# Altium PCB FC_PCB.PcbDoc (part 1 of 2)
Units mm, origin at the board's own origin, x right, y up, seen from the top; angles counter-clockwise.
Board outline 46 x 54 mm, 4 copper layers (Top Layer, GND, 3V3, Bottom Layer), stack 0.603 mm thick; 126 components, 94 nets, 458 pads, 139 vias.
Unrouted connection lines stored in the file: 5.
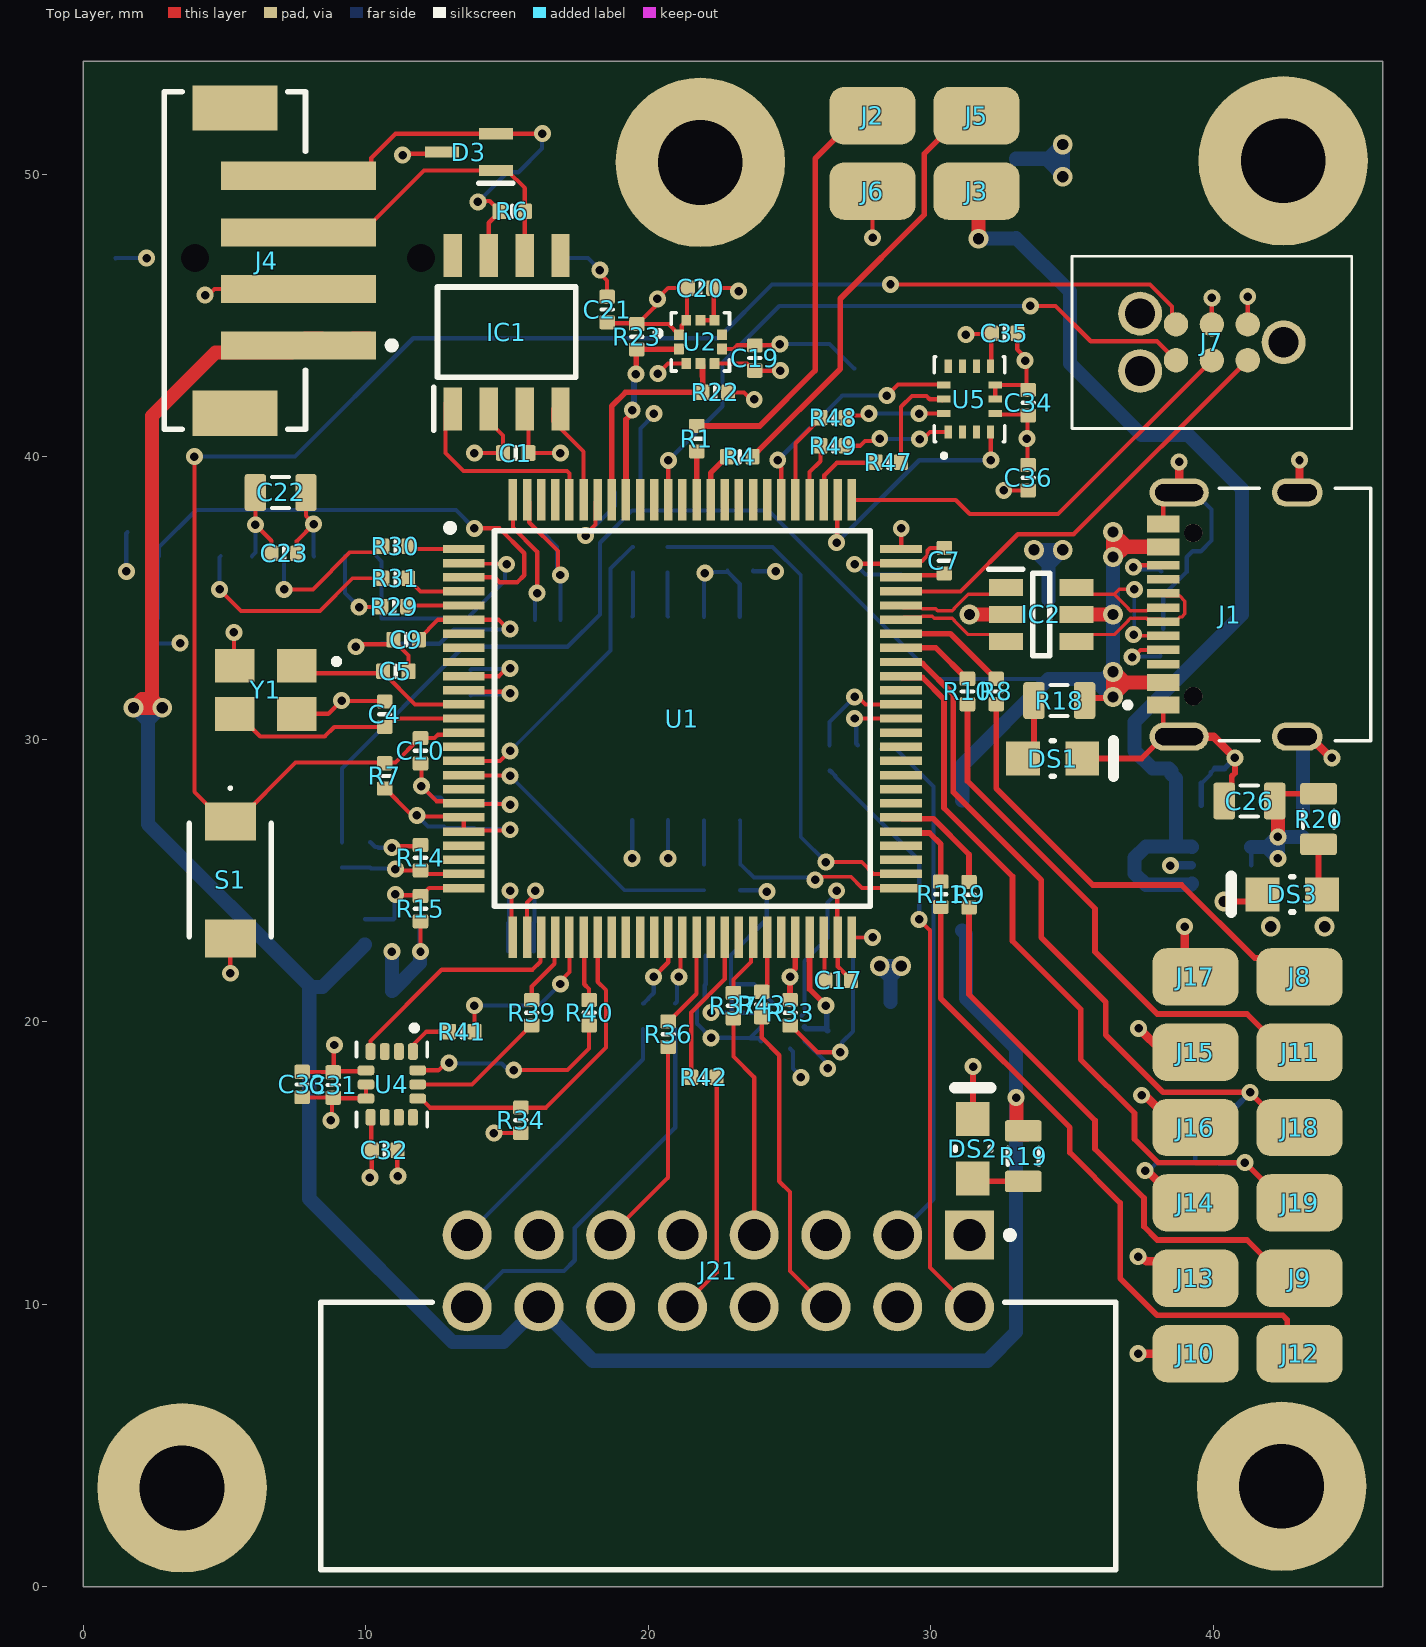
[diagram p0: Top Layer view]
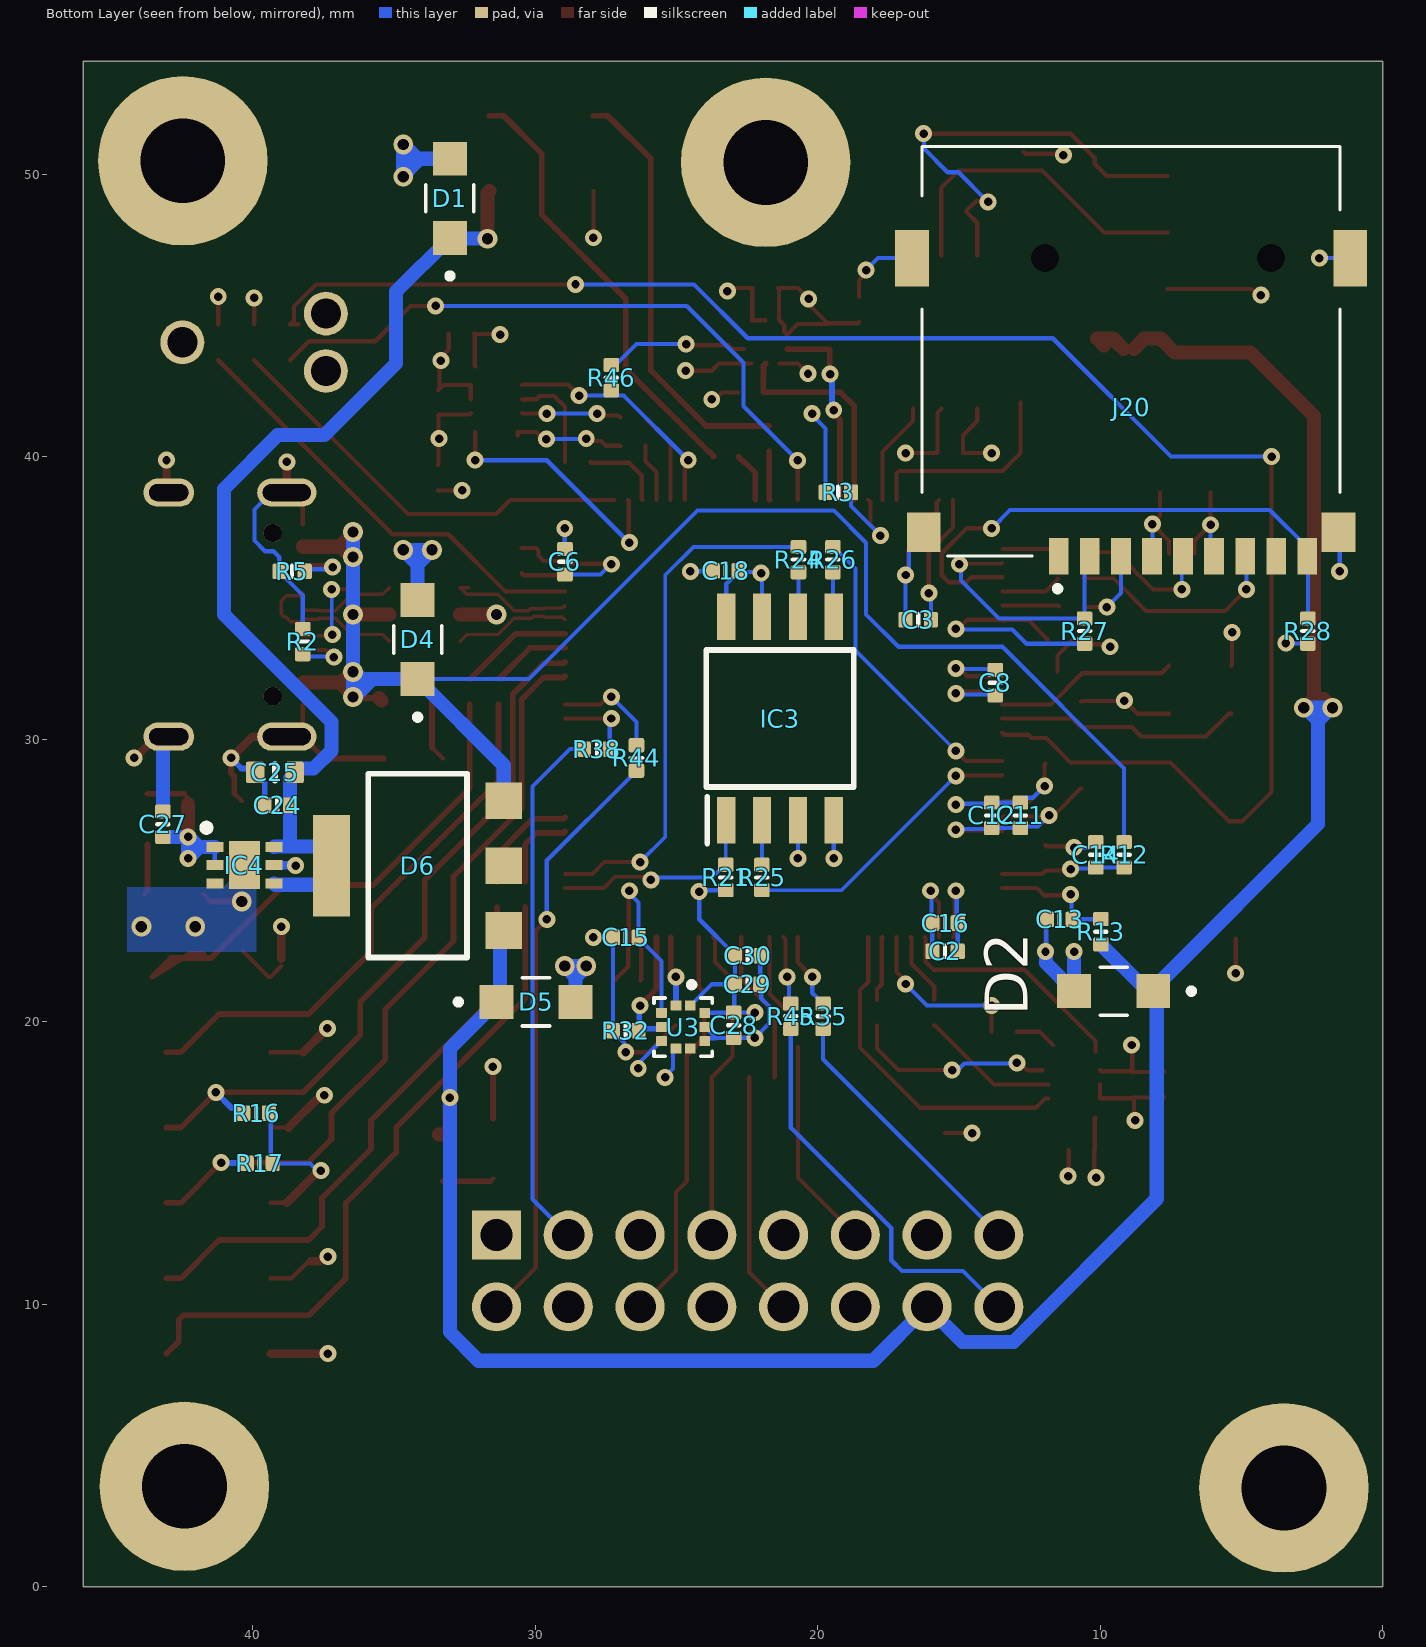
[diagram p1: Bottom Layer view, seen from below]
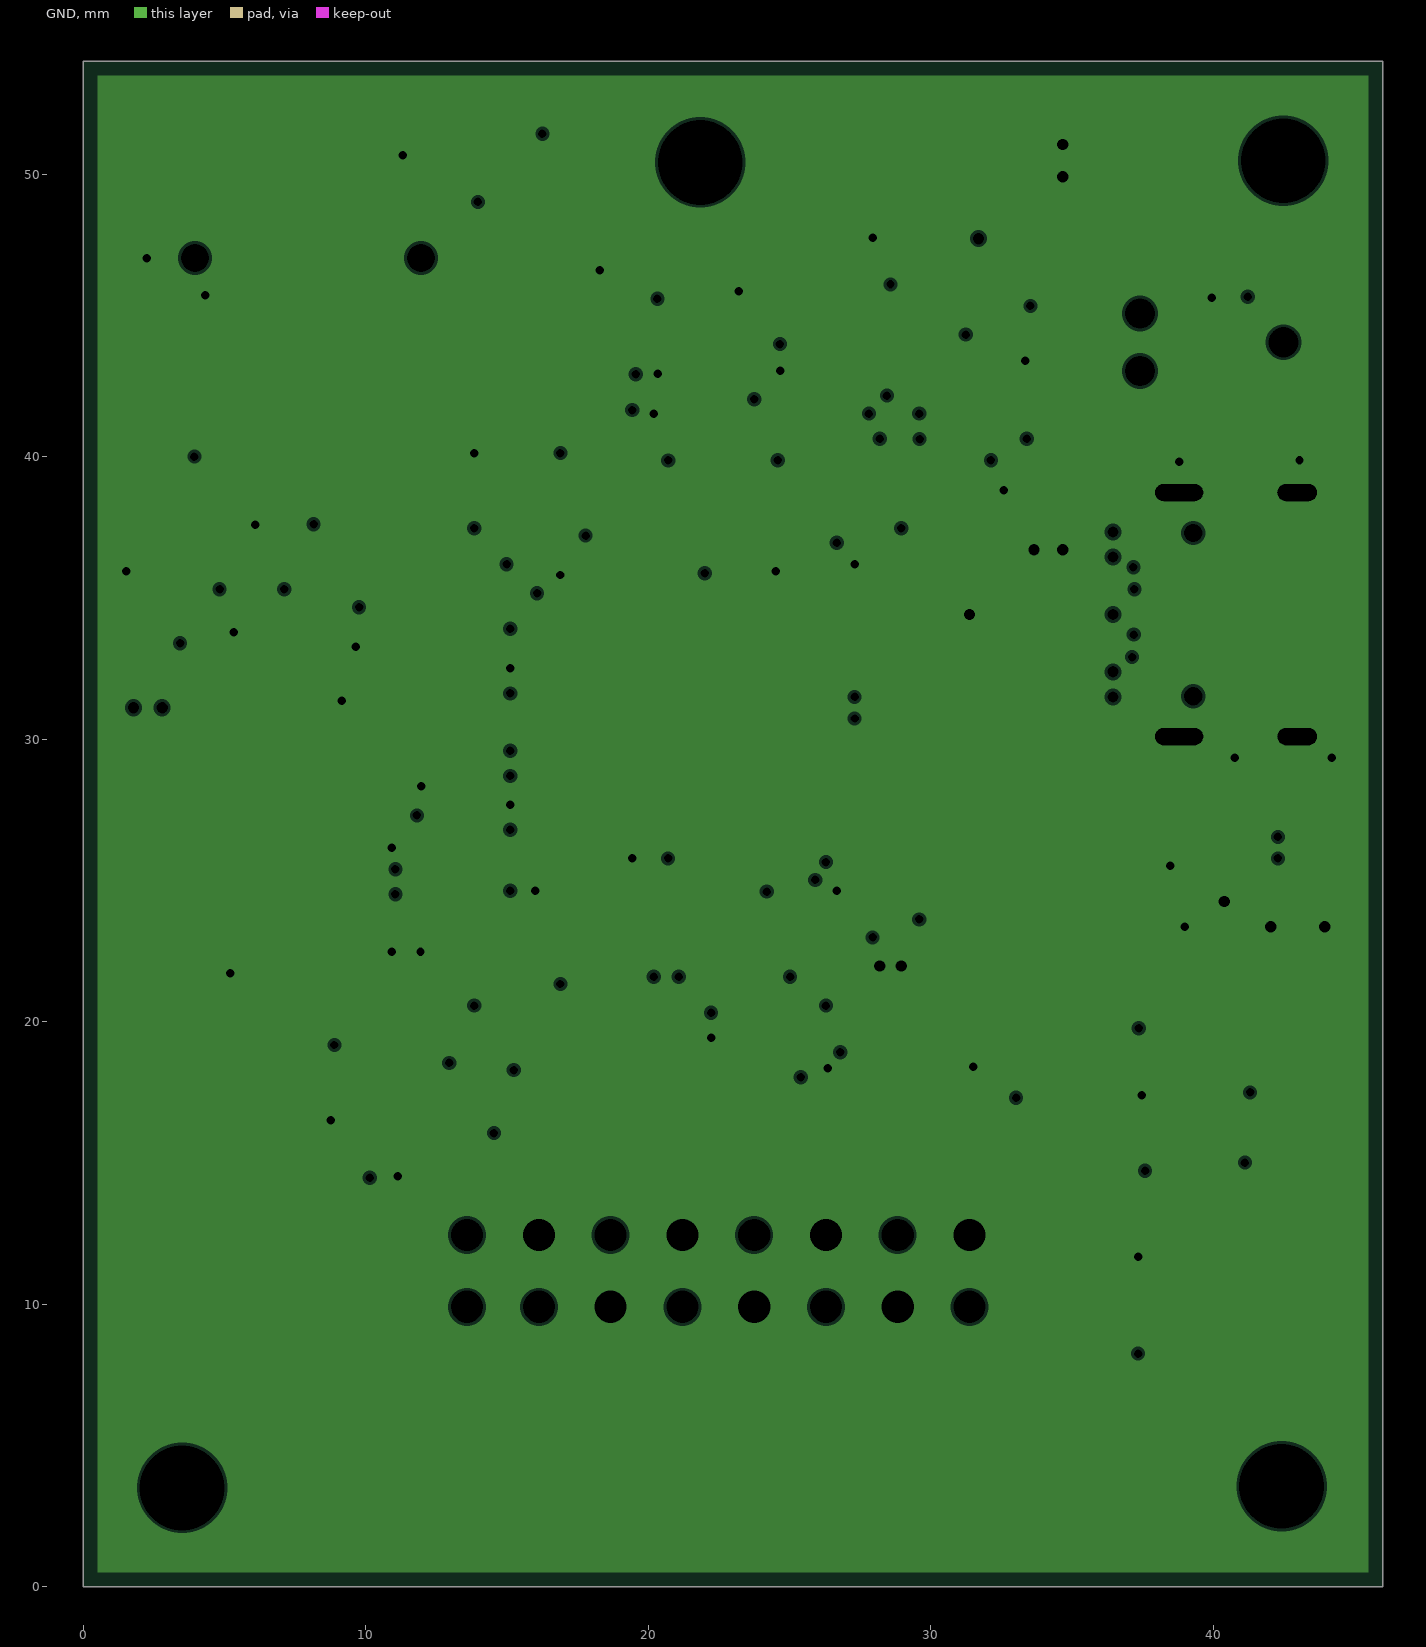
[diagram p2: GND, clearances drawn from the general rule]
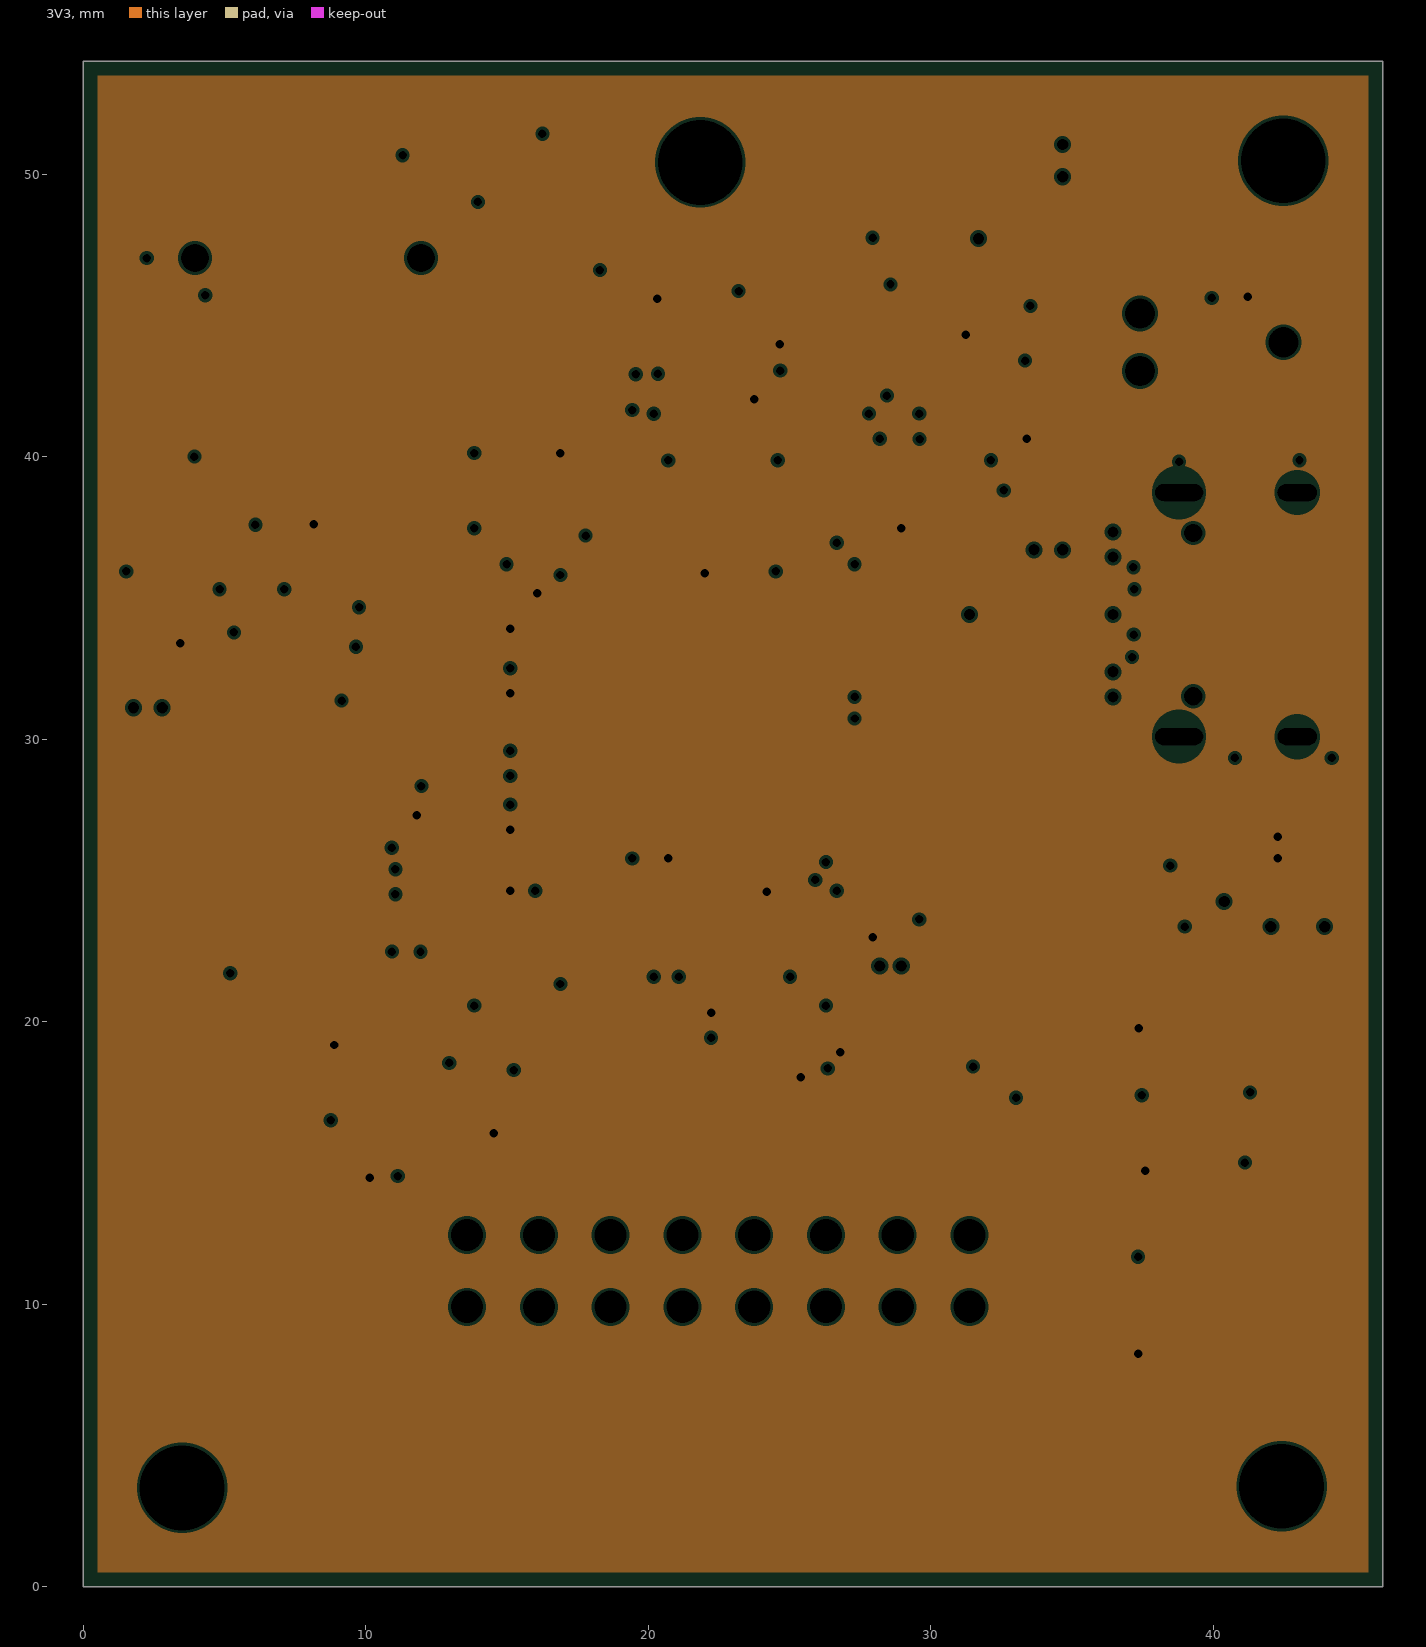
[diagram p3: 3V3, clearances drawn from the general rule]
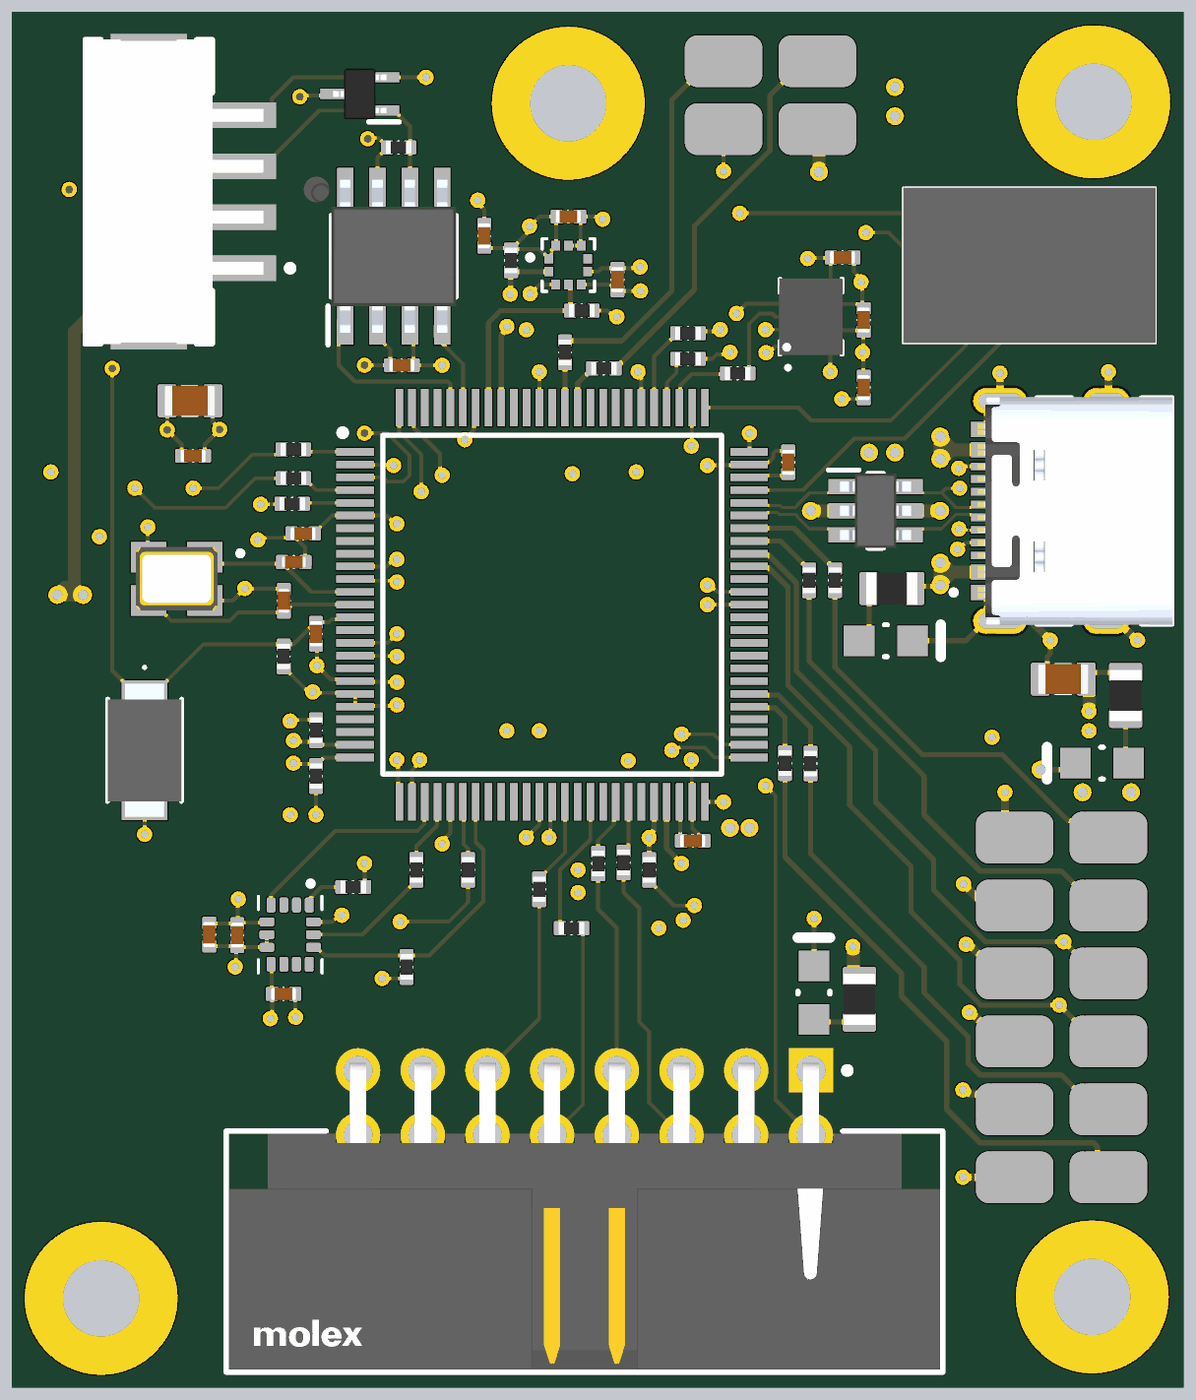
[diagram p5: 3D render of the assembled board from above, using the file's embedded part models]
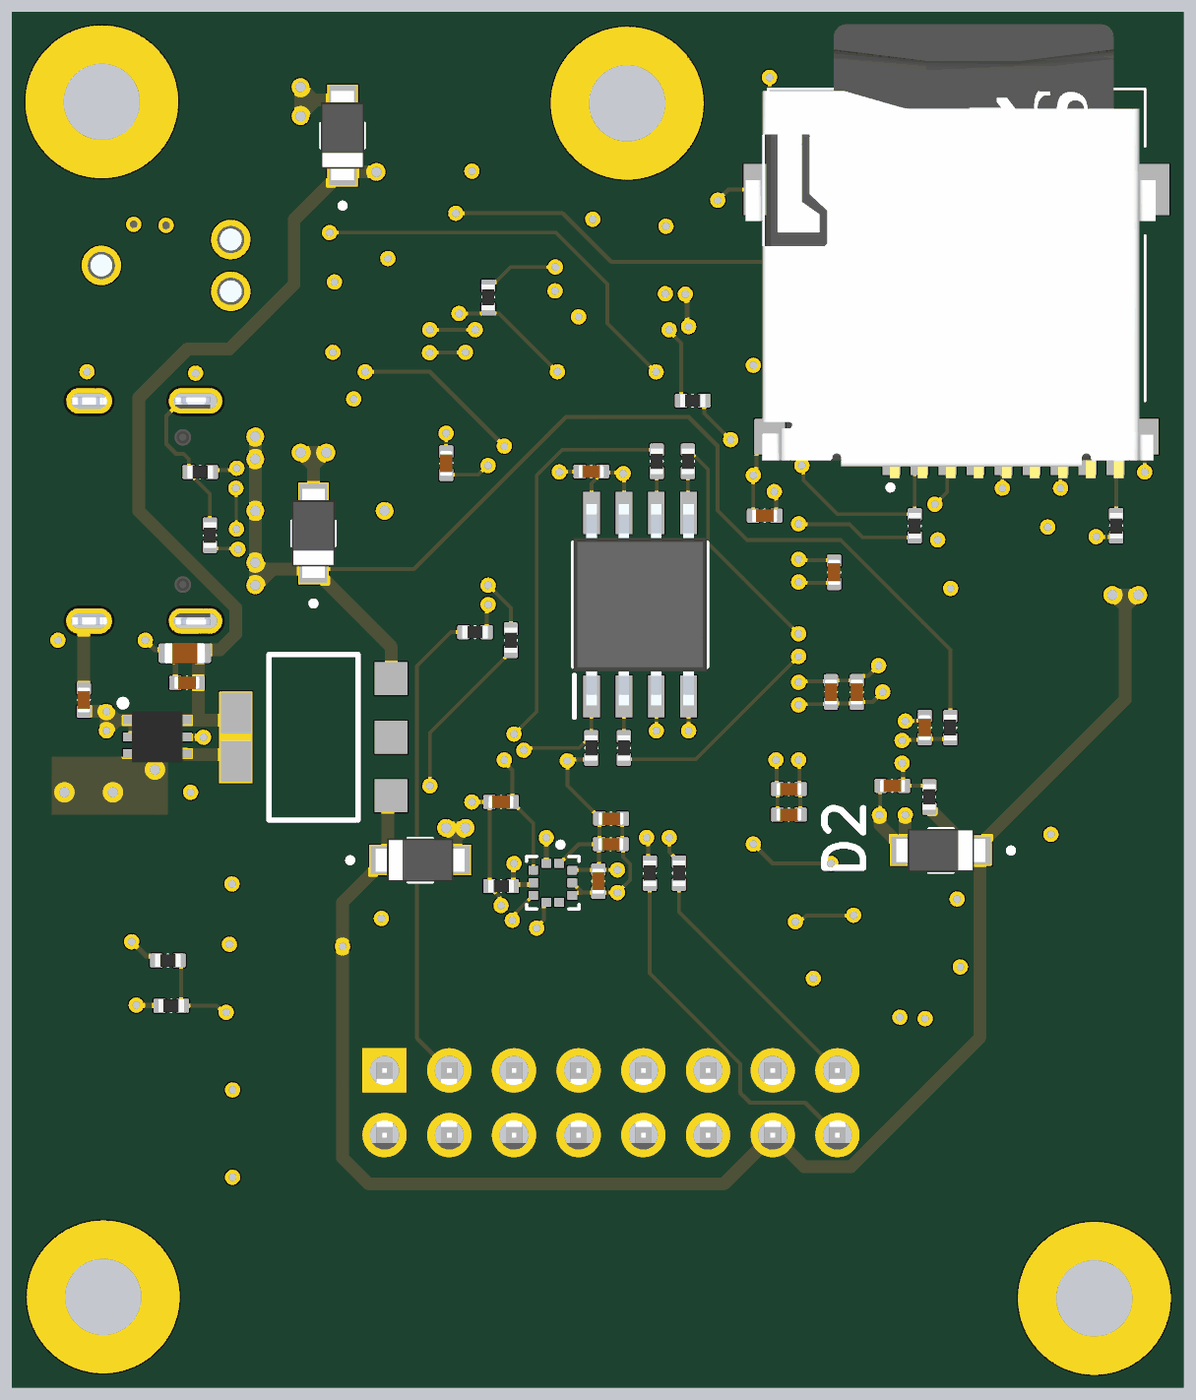
[diagram p6: 3D render of the assembled board from below, using the file's embedded part models]

## Layer stack, top to bottom
Top Solder: solder mask 0.0102, Solder Resist, Dk 3.5
Top Layer: signal copper 0.0356
Dielectric 2: prepreg 0.0711, PP-006, Dk 4.1
GND: plane copper 0.035, net GND
Dielectric 1: dielectric 0.32, FR-4, Dk 4.8
3V3: plane copper 0.035, net 3V3
Dielectric 3: prepreg 0.0711, PP-006, Dk 4.1
Bottom Layer: signal copper 0.0356
Bottom Solder: solder mask 0.0102, Solder Resist, Dk 3.5

## Board outline
0,0 0,54 46,54 46,0

## Design rules (kind name [scope] priority, off if disabled: settings)
BoardOutlineClearance [All] p1: gap=0.2 ignorepadtopadclearanceinfootprint=FALSE
Clearance I2C_Clearance [InNetClass('I2C')] p1: gap=0.127 ignorepadtopadclearanceinfootprint=TRUE except(0.25: Arc-Hole Track-Hole SMDPad-Hole THPad-Hole Via-Hole Fill-Hole Poly-Hole Region-Hole Text-Hole)
Clearance RF_Clearance [InNetClass('RF')] p2: gap=0.2 ignorepadtopadclearanceinfootprint=TRUE except(0.25: Arc-Hole Track-Hole SMDPad-Hole THPad-Hole Via-Hole Fill-Hole Poly-Hole Region-Hole Text-Hole)
Clearance HIGH_SPEED_Clearance [(InNetClass('SD_CARD') OR InNetClass('SENSORS_SPI'))] p3: gap=0.25 ignorepadtopadclearanceinfootprint=TRUE
Clearance [All] p4: gap=0.127 ignorepadtopadclearanceinfootprint=TRUE except(0.25: Arc-Hole Track-Hole SMDPad-Hole THPad-Hole Via-Hole Fill-Hole Poly-Hole Region-Hole Text-Hole)
ComponentClearance [All] p1: gap=0.102 collisioncheckmode=3 verticalgap=0.102 showdistances=TRUE
DiffPairsRouting USB_DIF_PAIR [All] p1: maxlimit=0.15 minlimit=0.15 mostfreqgap=0.15 toplayer_minwidth=0.12 toplayer_maxwidth=0.12 toplayer_prefwidth=0.12 bottomlayer_minwidth=0.12 bottomlayer_maxwidth=0.12 bottomlayer_prefwidth=0.12 maxuncoupledlength=12.7
DiffPairsRouting [All] p2: maxlimit=0.102 minlimit=0.102 mostfreqgap=0.102 toplayer_minwidth=0.102 toplayer_maxwidth=1816.048 toplayer_prefwidth=0.102 bottomlayer_minwidth=0.102 bottomlayer_maxwidth=1816.048 bottomlayer_prefwidth=0.102 maxuncoupledlength=12.7
Height [All] p1: minheight=0 maxheight=1816.048 prefheight=12.7
HoleSize [All] p1: absolutevalues=TRUE maxlimit=6.3 minlimit=0.2 maxpercent=80.000 minpercent=20.000
HoleToHoleClearance [All] p1: gap=0.25 allowstackedmicrovias=FALSE
MinimumAnnularRing [All] p1: minimumring=0.076
MinimumSolderMaskSliver [All] p1: minsoldermaskwidth=0
PlaneClearance [All] p1: clearance=0.102
PlaneConnect PlaneConnectPowerPads [InPadClass('PowerPads')] p1: planeconnectstyle=Direct reliefexpansion=0.508 reliefentries=4 reliefconductorwidth=0.254 reliefairgap=0.254
PlaneConnect [All] p2: pad.planeconnectstyle=Relief pad.reliefexpansion=0.3 pad.reliefentries=4 pad.reliefconductorwidth=0.102 pad.reliefairgap=0.102 via.planeconnectstyle=Direct via.reliefexpansion=0.3 via.reliefentries=4 via.reliefconductorwidth=0.127 via.reliefairgap=0.127
PolygonConnect POWER_RELIEF [(InNet('3V3') OR InNet('GND') OR InNetClass('POWER'))] p1: connectstyle=Direct reliefconductorwidth=0.3 reliefentries=4 polygonreliefangle="90 Angle" airgapwidth=0.254
PolygonConnect PolygonConnectPowerPads [All vs (InPadClass('PowerPads'))] p2: connectstyle=Direct reliefconductorwidth=0.254 reliefentries=4 polygonreliefangle="90 Angle" airgapwidth=0.254
PolygonConnect [All] p3: connectstyle=Relief reliefconductorwidth=0.102 reliefentries=4 polygonreliefangle="90 Angle" airgapwidth=0.102
RoutingVias Power [InNetClass('POWER')] p1: holewidth=0.4 width=0.7 viastyle="Through Hole" minholewidth=0.2 minwidth=0.6 maxholewidth=0.6 maxwidth=1
RoutingVias [All] p2: holewidth=0.3 width=0.6 viastyle="Through Hole" minholewidth=0.2 minwidth=0.45 maxholewidth=6.3 maxwidth=6.55
SilkToSilkClearance [All] p1: silktosilkclearance=0
SilkToSolderMaskClearance [IsPad] p1: minsilkscreentomaskgap=0.102 clearancetoexposedcopper=TRUE
SolderMaskExpansion [All] p1: expansion=0.05 istentingtop=FALSE
SupplyNets "Schematic Supply Nets_4" [InNet('VBUS')] p1: voltage=0.000
SupplyNets "Schematic Supply Nets_3" [InNet('VBAT')] p2: voltage=0.000
SupplyNets "Schematic Supply Nets_2" [InNet('GND')] p3: voltage=0.000
SupplyNets "Schematic Supply Nets_1" [InNet('5V')] p4: voltage=0.000
SupplyNets "Schematic Supply Nets" [InNet('3V3')] p5: voltage=0.000
Width RF/GPS_WIDTH [InNetClass('RF')] p1: maxlimit=0.3 minlimit=0.15 preferedwidth=0.2 minimp=50.000000 maximp=50.000000 favimp=50.000000
Width I2C_WIDTH [InNetClass('I2C')] p2: maxlimit=0.3 minlimit=0.15 preferedwidth=0.2 minimp=50.000000 maximp=50.000000 favimp=50.000000
Width SENSORS_WIDTH [InNetClass('SENSORS_SPI')] p3: maxlimit=0.2 minlimit=0.15 preferedwidth=0.15 minimp=50.000000 maximp=50.000000 favimp=50.000000
Width SD/FLASH_WIDTH [(InNetClass('FLASH_SPI') OR InNetClass('SD_CARD'))] p4: maxlimit=0.15 minlimit=0.13 preferedwidth=0.135 minimp=50.000000 maximp=50.000000 favimp=50.000000
Width Power_WIDTH [InNetClass('POWER')] p5: maxlimit=1 minlimit=0.3 preferedwidth=0.5 minimp=50.000000 maximp=50.000000 favimp=50.000000
Width [All] p6: maxlimit=0.3 minlimit=0.127 preferedwidth=0.15 minimp=50.000000 maximp=50.000000 favimp=50.000000
20 further rules are at their usual default settings.

## Classes and differential pairs
net class USB_DIF_PAIR: STM_D_N STM_D_P USB_D_N USB_D_P
net class I2C: Baro1_SCL Baro1_SDA Baro2_SCL Baro2_SDA I2C3_SCL I2C3_SDA
net class FLASH_SPI: FLASH_CLK FLASH_CS FLASH_DI FLASH_DO FLASH_MISO FLASH_MOSI FLASH_SCK
net class RF: GPS_RX GPS_RX_PAD GPS_TX GPS_TX_PAD RC_RX RC_RX_PAD RC_TX RC_TX_PAD TEL_RX TEL_RX_C TEL_TX TEL_TX_C
net class SD_CARD: SD_CS SD_MISO SD_MOSI SD_SCK TF-IN TF-OUT TF-SCK
net class SENSORS_SPI: AP_SCL AP_SDA AP_SDO IMU1_CS IMU1_INT IMU1_MISO IMU1_MOSI IMU1_SCK IMU2_CS IMU2_INT IMU2_MISO IMU2_MOSI IMU2_SCK SCX SDO SDX
net class POWER: 5V VBAT VBUS
component class FC_Sheet2: C18 C19 C20 C21 C23 C25 C27 C28 C29 C30 C31 C32 C33 C34 C35 C36 D4 D5 IC3 IC4 J19 J21 R18 R19 R21 R23 R27 R29 R31 R33 R35 R37 R39 R41 R48 U2 U3 U4 U5
component class FC_Main: C1 C2 C3 C4 C5 C9 C10 C11 C12 C13 C14 C15 C16 C17 D3 D4 D5 DS1 DS2 DS3 IC1 IC2 J4 J6 J7 J9 J11 J13 J15 J17 J19 J21 R1 R2 R5 R6 R7 R9 R11 R12 R13 R14 R15 R16 R17 R21 S1 U1 Y1
differential pair USB_D: +USB_D_P -USB_D_N
differential pair STM_D: +STM_D_P -STM_D_N

## Components (designator, comment, footprint, x,y, rotation, side; value= is the part's Value field where it differs from the comment)
C1 "Capacitor 100nF +/-20% 10V 0402" CAPC0402(1005)60_L 15.309,40.132 r180 top value=100nF
C2 "Capacitor 2,2µF +/-20% 10V 0402" CAPC0402(1005)60_L 15.494,22.493 r0 bottom value=2.2µF
C3 "Capacitor 100nF +/-20% 10V 0402" CAPC0402(1005)60_L 16.445,34.229 r0 bottom value=100nF
C4 "Capacitor 12pF +/-10% 50V 0402" CAPC0402(1005)33_L 10.675,30.886 r90 top value=12pF
C5 "Capacitor 12pF +/-10% 50V 0402" CAPC0402(1005)33_L 11.066,32.408 r0 top value=12pF
C6 "Capacitor 100nF +/-20% 10V 0402" CAPC0402(1005)60_L 28.947,36.284 r270 bottom value=100nF
C7 "Capacitor 2,2µF +/-20% 10V 0402" CAPC0402(1005)60_L 30.48,36.322 r90 top value=2.2µF
C8 "Capacitor 100nF +/-20% 10V 0402" CAPC0402(1005)60_L 13.716,32.004 r90 bottom value=100nF
C9 "Capacitor 100nF +/-20% 10V 0402" CAPC0402(1005)60_L 11.43,33.528 r180 top value=100nF
C10 "Capacitor 100nF +/-20% 10V 0402" CAPC0402(1005)60_L 11.938,29.591 r270 top value=100nF
C11 "Capacitor 2,2µF +/-20% 10V 0402" CAPC0402(1005)60_L 12.827,27.305 r90 bottom value=2.2µF
C12 "Capacitor 100nF +/-20% 10V 0402" CAPC0402(1005)60_L 13.843,27.305 r90 bottom value=100nF
C13 "Capacitor 100nF +/-20% 10V 0402" CAPC0402(1005)60_L 11.43,23.622 r0 bottom value=100nF
C14 "Capacitor 100nF +/-20% 10V 0402" CAPC0402(1005)60_L 10.16,25.908 r90 bottom value=100nF
C15 "Capacitor 100nF +/-20% 10V 0402" CAPC0402(1005)60_L 26.797,22.987 r180 bottom value=100nF
C16 "Capacitor 100nF +/-20% 10V 0402" CAPC0402(1005)60_L 15.494,23.495 r0 bottom value=100nF
C17 "Capacitor 2,2µF +/-20% 10V 0402" CAPC0402(1005)60_L 26.728,21.463 r0 top value=2.2µF
C18 "Capacitor 100nF +/-20% 10V 0402" CAPC0402(1005)60_L 23.254,35.961 r0 bottom value=100nF
C19 "Capacitor 100nF +/-20% 10V 0402" CAPC0402(1005)60_L 23.775,43.494 r270 top value=100nF
C20 "Capacitor 100nF +/-20% 10V 0402" CAPC0402(1005)60_L 21.847,45.97 r0 top value=100nF
C21 "Capacitor 2,2µF +/-20% 10V 0402" CAPC0402(1005)60_L 18.542,45.212 r90 top value=2.2µF
C22 "Capacitor 22µF +/-40% 16V 0805" CAPC0805(2012)145_L 6.985,38.735 r180 top value=22µF
C23 "Capacitor 100nF +/-20% 10V 0402" CAPC0402(1005)60_L 7.112,36.576 r180 top value=100nF
C24 "Capacitor 100nF +/-20% 10V 0402" CAPC0402(1005)60_L 39.129,27.669 r0 bottom value=100nF
C25 "Capacitor 10µF +/-20% 10V 0603" CAPC0603(1608)100_L 39.215,28.828 r180 bottom value=10µF
C26 "Capacitor 22µF +/-40% 16V 0805" CAPC0805(2012)145_L 41.275,27.813 r180 top value=22µF
C27 "Capacitor 100nF +/-20% 10V 0402" CAPC0402(1005)60_L 43.18,26.993 r90 bottom value=100nF
C28 "Capacitor 100nF +/-20% 10V 0402" CAPC0402(1005)60_L 22.978,19.88 r270 bottom value=100nF
C29 "Capacitor 100nF +/-20% 10V 0402" CAPC0402(1005)60_L 22.488,21.331 r180 bottom value=100nF
C30 "Capacitor 2,2µF +/-20% 10V 0402" CAPC0402(1005)60_L 22.476,22.333 r180 bottom value=2.2µF
C31 "Capacitor 100nF +/-20% 10V 0402" CAPC0402(1005)60_L 8.845,17.761 r270 top value=100nF
C32 "Capacitor 100nF +/-20% 10V 0402" CAPC0402(1005)60_L 10.664,15.453 r0 top value=100nF
C33 "Capacitor 2,2µF +/-20% 10V 0402" CAPC0402(1005)60_L 7.747,17.78 r270 top value=2.2µF
C34 "Capacitor 100nF +/-20% 10V 0402" CAPC0402(1005)60_L 33.446,41.911 r90 top value=100nF
C35 "Capacitor 100nF +/-20% 10V 0402" CAPC0402(1005)60_L 32.61,44.364 r0 top value=100nF
C36 "Capacitor 2,2µF +/-20% 10V 0402" CAPC0402(1005)60_L 33.446,39.258 r270 top value=2.2µF
D1 "PTVS5V0S1UR" TVS_PTVS5V0S1UR 33.02,49.149 r90 bottom
D2 "PTVS5V0S1UR" TVS_PTVS5V0S1UR 9.525,21.082 r0 bottom
D3 "ESD2CAN24DCKRQ1" SOT65P210X110-3N 13.655,50.785 r180 top
D4 "PTVS5V0S1UR" TVS_PTVS5V0S1UR 34.163,33.531 r90 bottom
D5 "PTVS5V0S1UR" TVS_PTVS5V0S1UR 29.972,20.701 r180 bottom
D6 "BAT160C" SOT223 34.163,25.527 r90 bottom
DS1 "LTST-C170KRKT" LTST-C170KRKT_V 34.311,29.317 r0 top
DS2 "LTST-C170KRKT" LTST-C170KRKT_V 31.487,15.502 r90 top
DS3 "LTST-C170KRKT" LTST-C170KRKT_V 42.799,24.511 r180 top
IC1 "TCAN332DR" SOIC127P600X175-8N 14.989,44.409 r90 top
IC2 "USBLC6-2SC6" SOT95P280X145-6N 33.909,34.417 r0 top
IC3 "W25Q128JVSIQ" SOIC127P790X216-8N 21.336,30.734 r90 bottom
IC4 "TLV76733DRVR" SON65P200X200X80-7N 40.293,25.542 r180 bottom
J1 "TYPE-C_16PIN_2MD_(073)" SHOUHAN_TYPE-C_16PIN_2MD_(073) 41.897,34.413 r90 top
J2 "3x2mm Pad" "3x2mm Pad-Footprint-1" 27.94,52.07 r0 top
J3 "3x2mm Pad" "3x2mm Pad-Footprint-1" 31.623,49.403 r0 top
J4 "B4B-PH-SM4-TB" FP-B4B-PH-SM4-TB-MFG 5.37,46.942 r90 top
J5 "3x2mm Pad" "3x2mm Pad-Footprint-1" 31.623,52.07 r0 top
J6 "3x2mm Pad" "3x2mm Pad-Footprint-1" 27.94,49.403 r0 top
J7 "TC2030-IDC-NL" TC2030IDCNL 39.95,44.051 r180 top
J8 "3x2mm Pad" "3x2mm Pad-Footprint-1" 43.053,21.59 r0 top
J9 "3x2mm Pad" "3x2mm Pad-Footprint-1" 43.053,10.922 r0 top
J10 "3x2mm Pad" "3x2mm Pad-Footprint-1" 39.37,8.255 r0 top
J11 "3x2mm Pad" "3x2mm Pad-Footprint-1" 43.053,18.923 r0 top
J12 "3x2mm Pad" "3x2mm Pad-Footprint-1" 43.053,8.255 r0 top
J13 "3x2mm Pad" "3x2mm Pad-Footprint-1" 39.37,10.922 r0 top
J14 "3x2mm Pad" "3x2mm Pad-Footprint-1" 39.37,13.589 r0 top
J15 "3x2mm Pad" "3x2mm Pad-Footprint-1" 39.37,18.923 r0 top
J16 "3x2mm Pad" "3x2mm Pad-Footprint-1" 39.37,16.256 r0 top
J17 "3x2mm Pad" "3x2mm Pad-Footprint-1" 39.37,21.59 r0 top
J18 "3x2mm Pad" "3x2mm Pad-Footprint-1" 43.053,16.256 r0 top
J19 "3x2mm Pad" "3x2mm Pad-Footprint-1" 43.053,13.589 r0 top
J20 "TF-01A" TF01A 8.909,43.731 r0 bottom
J21 "70247-1652" FP-70247-1652-MFG 22.479,5.334 r0 top
R1 "Resistor 22 +/-1 % 0402 63 mW" RESC0402(1005)_L 21.717,40.64 r90 top value=22
R2 "Resistor 5K1 +/-1 % 0402 63 mW" RESC0402(1005)_L 38.227,33.459 r90 bottom value=5k1
R3 "Resistor 10K  +/-1 % 0402 63 mW" RESC0402(1005)_L 19.271,38.744 r180 bottom value=10k
R4 "Resistor 22 +/-1 % 0402 63 mW" RESC0402(1005)_L 23.241,40.005 r0 top value=22
R5 "Resistor 5K1 +/-1 % 0402 63 mW" RESC0402(1005)_L 38.608,35.941 r0 bottom value=5k1
R6 "Resistor 120 +/-1 % 0402 63 mW" RESC0402(1005)_L 15.182,48.685 r180 top value=120
R7 "Resistor 10K  +/-1 % 0402 63 mW" RESC0402(1005)_L 10.668,28.702 r90 top value=10k
R8 "Resistor 22 +/-1 % 0402 63 mW" RESC0402(1005)_L 32.316,31.69 r90 top value=22
R9 "Resistor 22 +/-1 % 0402 63 mW" RESC0402(1005)_L 31.355,24.495 r270 top value=22
R10 "Resistor 22 +/-1 % 0402 63 mW" RESC0402(1005)_L 31.3,31.69 r90 top value=22
R11 "Resistor 22 +/-1 % 0402 63 mW" RESC0402(1005)_L 30.353,24.511 r270 top value=22
R12 "Resistor 100K +/-1 % 0402 63 mW" RESC0402(1005)_L 9.158,25.908 r270 bottom value=100k
R13 "Resistor 100K +/-1 % 0402 63 mW" RESC0402(1005)_L 9.978,23.184 r90 bottom value=100k
R14 "Resistor 100K +/-1 % 0402 63 mW" RESC0402(1005)_L 11.938,25.805 r90 top value=100k
R15 "Resistor 100K +/-1 % 0402 63 mW" RESC0402(1005)_L 11.938,24.003 r270 top value=100k
R16 "4D7KR2F" RESC0402(1005)_L 39.878,16.764 r180 bottom value=4.7k
R17 "4D7KR2F" RESC0402(1005)_L 39.751,14.986 r180 bottom value=4.7k
R18 "Resistor 470R +/-5% 0805 125 mW" RESC0805(2012)_L 34.544,31.369 r180 top value=470
R19 "Resistor 470R +/-5% 0805 125 mW" RESC0805(2012)_L 33.274,15.24 r270 top value=470
R20 "Resistor 470R +/-5% 0805 125 mW" RESC0805(2012)_L 43.727,27.168 r270 top value=470
R21 "Resistor 10K  +/-1 % 0402 63 mW" RESC0402(1005)_L 23.257,25.107 r90 bottom value=10k
R22 "4D7KR2F" RESC0402(1005)_L 22.373,42.278 r0 top value=4.7k
R23 "4D7KR2F" RESC0402(1005)_L 19.595,44.247 r90 top value=4.7k
R24 "Resistor 100K +/-1 % 0402 63 mW" RESC0402(1005)_L 20.682,36.361 r270 bottom value=100k
R25 "Resistor 22 +/-1 % 0402 63 mW" RESC0402(1005)_L 21.976,25.107 r270 bottom value=22
R26 "Resistor 100K +/-1 % 0402 63 mW" RESC0402(1005)_L 19.461,36.361 r270 bottom value=100k
R27 "Resistor 10K  +/-1 % 0402 63 mW" RESC0402(1005)_L 10.554,33.829 r90 bottom value=10k
R28 "Resistor 10K  +/-1 % 0402 63 mW" RESC0402(1005)_L 2.648,33.829 r90 bottom value=10k
R29 "Resistor 22 +/-1 % 0402 63 mW" RESC0402(1005)_L 11.006,34.695 r0 top value=22
R30 "Resistor 22 +/-1 % 0402 63 mW" RESC0402(1005)_L 11.049,36.83 r0 top value=22
R31 "Resistor 22 +/-1 % 0402 63 mW" RESC0402(1005)_L 11.05,35.697 r0 top value=22
R32 "4D7KR2F" RESC0402(1005)_L 26.797,19.685 r0 bottom value=4.7k
R33 "4D7KR2F" RESC0402(1005)_L 25.019,20.32 r270 top value=4.7k
R34 "Resistor 10K  +/-1 % 0402 63 mW" RESC0402(1005)_L 15.494,16.51 r90 top value=10k
R35 "Resistor 22 +/-1 % 0402 63 mW" RESC0402(1005)_L 19.812,20.193 r90 bottom value=22
R36 "Resistor 22 +/-1 % 0402 63 mW" RESC0402(1005)_L 20.701,19.558 r90 top value=22
R37 "Resistor 22 +/-1 % 0402 63 mW" RESC0402(1005)_L 23.016,20.57 r90 top value=22
R38 "Resistor 22 +/-1 % 0402 63 mW" RESC0402(1005)_L 27.818,29.651 r180 bottom value=22
R39 "Resistor 22 +/-1 % 0402 63 mW" RESC0402(1005)_L 15.875,20.32 r90 top value=22
R40 "Resistor 22 +/-1 % 0402 63 mW" RESC0402(1005)_L 17.907,20.32 r90 top value=22
R41 "Resistor 22 +/-1 % 0402 63 mW" RESC0402(1005)_L 13.399,19.65 r0 top value=22
R42 "Resistor 22 +/-1 % 0402 63 mW" RESC0402(1005)_L 21.971,18.034 r180 top value=22
R43 "Resistor 22 +/-1 % 0402 63 mW" RESC0402(1005)_L 24.017,20.61 r90 top value=22
R44 "Resistor 22 +/-1 % 0402 63 mW" RESC0402(1005)_L 26.416,29.337 r90 bottom value=22
R45 "Resistor 22 +/-1 % 0402 63 mW" RESC0402(1005)_L 20.955,20.193 r90 bottom value=22
R46 "Resistor 10K  +/-1 % 0402 63 mW" RESC0402(1005)_L 27.305,42.799 r270 bottom value=10k
R47 "Resistor 22 +/-1 % 0402 63 mW" RESC0402(1005)_L 28.495,39.811 r180 top value=22
R48 "Resistor 22 +/-1 % 0402 63 mW" RESC0402(1005)_L 26.543,41.388 r180 top value=22
R49 "Resistor 22 +/-1 % 0402 63 mW" RESC0402(1005)_L 26.543,40.386 r180 top value=22
S1 "TS-1088-AR02016" TS1088AR02016 5.207,25.019 r270 top
U1 "STM32H743VIT6" QFP50P1600X1600X160-100N 21.209,30.734 r0 top
U2 "BMP388" PQFN50P200X200X80-10N 21.847,44.065 r0 top
U3 "BMP388" PQFN50P200X200X80-10N 24.765,19.812 r270 bottom
U4 "ICM-42688-P" PQFN50P300X250X97-14N 10.922,17.78 r270 top
U5 "BMI270" XDCR_BMI270 31.369,42.037 r90 top
Y1 "X322516MLB4SI" X322516MLB4SI 6.465,31.75 r180 top

## Footprints (in the part's own frame and the unit in brackets; to place one, negate y for a bottom-side part, rotate by r counter-clockwise, add the part's x,y. Pads: shape width x height; smd on the part's side, far side on the other; paste and mask are expansions set on the pad)
"3x2mm Pad-Footprint-1" [mil]
  rrect50% 120x80 smd: 1(0,0)
CAPC0402(1005)33_L [mm] "Chip Capacitor, Body 1.0x0.5mm, Height 0.33mm, IPC High Density"
  rrect25% 0.5x0.55 smd: 1(-0.45,0) 2(0.45,0)
  silkscreen extent 0,-0.2 0,0.2, body extent -0.5,-0.25 0.5,0.25, height 0.55
CAPC0402(1005)60_L [mm] "Chip Capacitor, Body 1.0x0.5mm, Height 0.6mm, IPC High Density"
  rrect25% 0.5x0.55 smd: 1(-0.45,0) 2(0.45,0)
  silkscreen extent 0,-0.2 0,0.2, body extent -0.5,-0.25 0.5,0.25, height 0.6
CAPC0603(1608)100_L [mm] "Chip Capacitor, Body 1.6x0.8mm, Height 1.0mm, IPC High Density"
  rrect25% 0.66x0.76 smd: 1(-0.7,0) 2(0.7,0)
  silkscreen extent 0,-0.3 0,0.3, body extent -0.8,-0.4 0.8,0.4, height 0.95
CAPC0805(2012)145_L [mm] "Chip Capacitor, Body 2.0x1.2mm, Height 1.45mm, IPC High Density"
  rrect25% 0.76x1.3 smd: 1(-0.9,0) 2(0.89,0)
  silkscreen extent -0.3,-0.55 0.3,0.55, body extent -1,-0.6 1,0.6, height 1.45
FP-70247-1652-MFG [mm]
  rect 1.74x1.74 hole 1.14 paste-2539.97 mask+0: 1(8.89,7.115)
  round 1.74 hole 1.14 paste-2539.97 mask+0: 2(8.89,4.575) 3(6.35,7.115) 4(6.35,4.575) 5(3.81,7.115) 6(3.81,4.575) 7(1.27,7.115) 8(1.27,4.575) 9(-1.27,7.115) 10(-1.27,4.575) 11(-3.81,7.115) 12(-3.81,4.575) 13(-6.35,7.115) 14(-6.35,4.575) 15(-8.89,7.115) 16(-8.89,4.575)
  silkscreen extent -14.07,-4.73 14.07,7.24, body extent -14.17,-4.83 14.17,8.08, height 0.25
FP-B4B-PH-SM4-TB-MFG [mm]
  rect 1x5.5 smd paste+0 mask+0: 1(-3,-2.25) 2(-1,-2.25) 3(1,-2.25) 4(3,-2.25)
  rect 1.6x3 smd paste+0 mask+0: 5(-5.4,0) 6(5.4,0)
  silkscreen extent -5.97,-5.68 5.97,2.5, body extent -6.3,-5.1 6.3,2.6, height 0.25
LTST-C170KRKT_V [mm] "SMD, 2-Leads, Body 2x1.25mm"
  rect 1.2x1.2 smd: 1(-1.05,0) 2(1.05,0)
  silkscreen extent -0.05,-0.64 2.16,0.64, body extent -1,-0.63 1,0.63, height 1.2
PQFN50P200X200X80-10N [mm]
  rrect9% 0.35x0.38 smd: 1(-0.765,0.25) 2(-0.765,-0.25) 3(-0.5,-0.765) 4(0,-0.765) 5(0.5,-0.765) 6(0.765,-0.25) 7(0.765,0.25) 8(0.5,0.765) 9(0,0.765) 10(-0.5,0.765)
  silkscreen extent -1.6,-1.03 1.03,1.03
PQFN50P300X250X97-14N [mm]
  rrect50% 0.59x0.35 smd mask+0: 1(-1.165,0.75) 2(-1.165,0.25) 3(-1.165,-0.25) 4(-1.165,-0.75) 8(1.165,-0.75) 9(1.165,-0.25) 10(1.165,0.25) 11(1.165,0.75)
  rrect50% 0.35x0.59 smd mask+0: 5(-0.5,-0.915) 6(0,-0.915) 7(0.5,-0.915) 12(0.5,0.915) 13(0,0.915) 14(-0.5,0.915)
  silkscreen extent -2.1,-1.25 1.5,1.25
QFP50P1600X1600X160-100N [mm]
  rect 1.475x0.3 smd: 1(-7.738,6) 2(-7.738,5.5) 3(-7.738,5) 4(-7.738,4.5) 5(-7.738,4) 6(-7.738,3.5) 7(-7.738,3) 8(-7.738,2.5) 9(-7.738,2) 10(-7.738,1.5) 11(-7.738,1) 12(-7.738,0.5) 13(-7.738,0) 14(-7.738,-0.5) 15(-7.738,-1) 16(-7.738,-1.5) 17(-7.738,-2) 18(-7.738,-2.5) 19(-7.738,-3) 20(-7.738,-3.5) 21(-7.738,-4) 22(-7.738,-4.5) 23(-7.738,-5) 24(-7.738,-5.5) 25(-7.738,-6) 51(7.738,-6) 52(7.738,-5.5) 53(7.738,-5) 54(7.738,-4.5) 55(7.738,-4) 56(7.738,-3.5) 57(7.738,-3) 58(7.738,-2.5) 59(7.738,-2) 60(7.738,-1.5) 61(7.738,-1) 62(7.738,-0.5) 63(7.738,0) 64(7.738,0.5) 65(7.738,1) 66(7.738,1.5) 67(7.738,2) 68(7.738,2.5) 69(7.738,3) 70(7.738,3.5) 71(7.738,4) 72(7.738,4.5) 73(7.738,5) 74(7.738,5.5) 75(7.738,6)
  rect 0.3x1.475 smd: 26(-6,-7.738) 27(-5.5,-7.738) 28(-5,-7.738) 29(-4.5,-7.738) 30(-4,-7.738) 31(-3.5,-7.738) 32(-3,-7.738) 33(-2.5,-7.738) 34(-2,-7.738) 35(-1.5,-7.738) 36(-1,-7.738) 37(-0.5,-7.738) 38(0,-7.738) 39(0.5,-7.738) 40(1,-7.738) 41(1.5,-7.738) 42(2,-7.738) 43(2.5,-7.738) 44(3,-7.738) 45(3.5,-7.738) 46(4,-7.738) 47(4.5,-7.738) 48(5,-7.738) 49(5.5,-7.738) 50(6,-7.738) 76(6,7.738) 77(5.5,7.738) 78(5,7.738) 79(4.5,7.738) 80(4,7.738) 81(3.5,7.738) 82(3,7.738) 83(2.5,7.738) 84(2,7.738) 85(1.5,7.738) 86(1,7.738) 87(0.5,7.738) 88(0,7.738) 89(-0.5,7.738) 90(-1,7.738) 91(-1.5,7.738) 92(-2,7.738) 93(-2.5,7.738) 94(-3,7.738) 95(-3.5,7.738) 96(-4,7.738) 97(-4.5,7.738) 98(-5,7.738) 99(-5.5,7.738) 100(-6,7.738)
  silkscreen extent -8.35,-6.65 6.65,6.87
RESC0402(1005)_L [mm] "Chip Resistor, Body 1.0x0.5mm, IPC High Density"
  rrect25% 0.5x0.55 smd: 1(-0.45,0) 2(0.45,0)
  silkscreen extent 0,-0.2 0,0.2, body extent -0.5,-0.25 0.5,0.25, height 0.3
RESC0805(2012)_L [mm] "Chip Resistor, Body 2.0x1.3mm, IPC High Density"
  rrect25% 0.76x1.3 smd: 1(-0.9,0) 2(0.89,0)
  silkscreen extent -0.3,-0.55 0.3,0.55, body extent -1,-0.62 1,0.63, height 0.6
SHOUHAN_TYPE-C_16PIN_2MD_(073) [mm]
  rect 0.6x1.15 smd paste+0 mask+0: A1_B12(-3.2,3.67) A4_B9(-2.4,3.67) B1_A12(3.2,3.67) B4_A9(2.4,3.67)
  rect 0.3x1.15 smd paste+0 mask+0: A5(-1.25,3.67) A6(-0.25,3.67) A7(0.25,3.67) A8(1.25,3.67) B5(1.75,3.67) B6(0.75,3.67) B7(-0.75,3.67) B8(-1.75,3.67)
  oval 1x1.8 hole 0.6 slot 1.4 at 90 deg mask+0.102: SH1(-4.32,-1.075) SH2(4.32,-1.075)
  oval 1x2.1 hole 0.6 slot 1.7 at 90 deg mask+0.102: SH3(-4.32,3.105) SH4(4.32,3.105)
  round 0.65 hole 0.65 unplated mask+0: ""(-2.89,2.605) ""(2.89,2.605)
  silkscreen extent -4.47,-3.67 4.47,5.02, body extent -4.47,-3.67 4.47,3.98, height 3.26
SOIC127P600X175-8N [mm]
  rect 1.525x0.65 smd: 1(-2.712,1.905) 2(-2.712,0.635) 3(-2.712,-0.635) 4(-2.712,-1.905) 5(2.712,-1.905) 6(2.712,-0.635) 7(2.712,0.635) 8(2.712,1.905)
  silkscreen extent -3.47,-2.45 1.6,2.58, body extent -3,-2.45 3,2.45, height 1.75
SOIC127P790X216-8N [mm]
  rect 1.65x0.65 smd: 1(-3.6,1.905) 2(-3.6,0.635) 3(-3.6,-0.635) 4(-3.6,-1.905) 5(3.6,-1.905) 6(3.6,-0.635) 7(3.6,0.635) 8(3.6,1.905)
  silkscreen extent -4.43,-2.62 2.42,2.62, body extent -3.95,-2.62 3.95,2.62, height 2.16
SON65P200X200X80-7N [mm]
  rect 0.6x0.35 smd: 1(-1.05,0.65) 2(-1.05,0) 3(-1.05,-0.65) 4(1.05,-0.65) 5(1.05,0) 6(1.05,0.65)
  rect 1.1x1.7 smd: 7(0,0)
  silkscreen extent -1.48,1.2 -1.23,1.45, body extent -1,-1 1,1, height 0.8
SOT65P210X110-3N [mm]
  rect 1.2x0.4 smd: 1(-0.95,0.65) 2(-0.95,-0.65) 3(0.95,0)
  silkscreen extent -1.55,1.1 -0.35,1.1, body extent -1.05,-1 1.05,1, height 1
SOT95P280X145-6N [mm]
  rect 1.2x0.6 smd: 1(-1.25,0.95) 2(-1.25,0) 3(-1.25,-0.95) 4(1.25,-0.95) 5(1.25,0) 6(1.25,0.95)
  silkscreen extent -1.85,-1.46 0.3,1.6, body extent -1.4,-1.46 1.4,1.46, height 1.45
SOT223 [mm]
  rect 1.3x1.3 smd: 1(-2.3,-3.05) 2(0,-3.05) 3(2.3,-3.05)
  rect 3.6x1.3 smd paste-3: 4(0,3.05)
  silkscreen extent -3.25,-1.75 3.25,1.75
TC2030IDCNL [mm]
  round 0.863 smd: 1(-1.27,-0.635) 2(-1.27,0.635) 3(0,-0.635) 4(0,0.635) 5(1.27,-0.635) 6(1.27,0.635)
  round 1.55 hole 1.067: 7(-2.54,0) 8(2.54,-1.016) 9(2.54,1.016)
  silkscreen extent -4.95,-3.05 4.95,3.05, body extent -4.95,-3.05 4.95,3.05, height 18.77
TF01A [mm]
  rect 0.7x1.3 smd: 1(2.56,7.25) 2(1.46,7.25) 3(0.36,7.25) 4(-0.74,7.25) 5(-1.84,7.25) 6(-2.94,7.25) 7(-4.04,7.25) 8(-5.14,7.25) CD1(-6.24,7.25)
  round 0.5 hole 1 unplated: 14(-4.95,-3.3) 15(3.05,-3.3)
  rect 1.2x1.4 smd: MP1(-7.34,6.4) MP4(7.34,6.4)
  rect 1.2x2 smd: MP2(-7.76,-3.3) MP3(7.76,-3.3)
  silkscreen extent -7.4,-7.25 7.4,8.5, body extent -7.82,-9.79 8.28,8.03, height 2.4
TS1088AR02016 [mm]
  rect 1.35x1.8 smd: 1(-2.075,0) 2(2.075,0)
  silkscreen extent -3.3,-1.45 2,1.45, body extent -2.62,-1.45 2.62,1.45, height 2.1
TVS_PTVS5V0S1UR [mm]
  rect 1.2x1.2 smd paste-0.05: A(1.4,0) C(-1.4,0)
  silkscreen extent -2.85,-0.85 0.48,0.85, body extent -1.75,-0.85 1.75,0.85, height 1.1
X322516MLB4SI [mm]
  rect 1.4x1.2 smd: 1(-1.1,-0.85) 2(1.1,-0.85) 3(1.1,0.85) 4(-1.1,0.85)
  silkscreen extent -2.6,-1.1 -2.4,-0.9, body extent -1.6,-1.25 1.6,1.25, height 0.7
XDCR_BMI270 [mm]
  rect 0.475x0.25 smd: 1(-1.162,0.75) 2(-1.162,0.25) 3(-1.162,-0.25) 4(-1.162,-0.75) 8(1.162,-0.75) 9(1.162,-0.25) 10(1.162,0.25) 11(1.162,0.75)
  rect 0.25x0.475 smd: 5(-0.5,-0.913) 6(0,-0.913) 7(0.5,-0.913) 12(0.5,0.913) 13(0,0.913) 14(-0.5,0.913)
  silkscreen extent -2.07,-1.25 1.5,1.25, body extent -1.5,-1.25 1.5,1.25, height 0.87

## Part data
C1 C3 C6 C8 C9 C10 C12 C13 C14 C15 C16 C18 C19 C20 C23 C24 C27 C28 C29 C31 C32 C34 C35: library part CMP-001-00061-3, "Chip Capacitor, 100nF +/-20%, 10V, 0402, Thickness 0.6 mm", Case/Package=0402, Max Operating Temperature=85°C, Min Operating Temperature=-55°C, Tolerance=20%, Voltage Rating=10V, Mounting Technology=SMT, Pins=2
C2 C7 C11 C17 C21 C30 C33 C36: library part CMP-001-00056-4, "Chip Capacitor, 2,2µF +/-20%, 10V, 0402, Thickness 0.6 mm", Case/Package=0402, Max Operating Temperature=85°C, Min Operating Temperature=-55°C, Tolerance=10%, Voltage Rating=10V, Mounting Technology=SMT, Pins=2
C4 C5: library part CMP-001-00072-4, "Chip Capacitor, 12pF +/-10%, 50V, 0402, Thickness 0.33 mm", Case/Package=0402, Max Operating Temperature=85°C, Min Operating Temperature=-55°C, Tolerance=20%, Voltage Rating=50V, Mounting Technology=SMT, Pins=2
C22 C26: library part CMP-001-00081-4, "Chip Capacitor, 22µF +/-40%, 16V, 0805, Thickness 1.45 mm", Case/Package=0805, Max Operating Temperature=85°C, Min Operating Temperature=-55°C, Tolerance=5%, Voltage Rating=16V, Mounting Technology=SMT, Pins=2
C25: library part CMP-001-00075-4, "Chip Capacitor, 10µF +/-20%, 10V, 0603, Thickness 1 mm", Case/Package=0603, Max Operating Temperature=85°C, Min Operating Temperature=-55°C, Tolerance=10%, Voltage Rating=10V, Mounting Technology=SMT, Pins=2
D1 D2 D4 D5: library part CMP-004-00031-1, "9.2V Clamp 43.5A Ipp Tvs Diode Surface Mount SOD-123W", Case/Package="SOD-123 Nexperia USA", Availability="In Stock", Check_prices=https://www.snapeda.com/parts/PTVS5V0S1UR/Nexperia/view-part/?ref=eda, Component Type=Standard, Design Item ID=PTVS5V0S1UR, MF="Nexperia USA", MP=PTVS5V0S1UR, Pins=2, Price=None, Purchase-URL=https://pricing.snapeda.com/search/part/PTVS5V0S1UR/?ref=eda, SnapEDA_Link=https://www.snapeda.com/parts/PTVS5V0S1UR/Nexperia/view-part/?ref=snap, Source=PTVS5V0S1UR.SchLib
D3: "TVS Diode (Bi-directional)", Manufacturer_Name="Texas Instruments", Mouser Part Number=595-ESD2CAN24DCKRQ1, Arrow Part Number=ESD2CAN24DCKRQ1, Arrow Price/Stock=https://www.arrow.com/en/products/esd2can24dckrq1/texas-instruments?utm_currency=USD&region=nac, Datasheet Link=https://www.ti.com/lit/ds/symlink/esd2can24-q1.pdf?ts=1669637432096&ref_url=https%253A%252F%252Fwww.ti.com%252Fproduct%252FESD2CAN24-Q1, Height=1.1mm, Manufacturer_Part_Number=ESD2CAN24DCKRQ1, Mouser Price/Stock=https://www.mouser.co.uk/ProductDetail/Texas-Instruments/ESD2CAN24DCKRQ1?qs=Y0Uzf4wQF3mF7ctB4rszMA%3D%3D
D6: library part CMP-004-00032-1, "Diode Array 1 Pair Common Cathode Schottky 60 V 1A (DC) Surface Mount TO-261-4, TO-261AA", Case/Package="TO-261-4 Nexperia USA", Availability="In Stock", Check_prices=https://www.snapeda.com/parts/BAT160C/NXP+Semiconductors/view-part/?ref=eda, Component Type=Standard, Design Item ID=BAT160C, MF="NXP Semiconductors", MP=BAT160C, Pins=3, Price=None, Purchase-URL=https://pricing.snapeda.com/search/part/BAT160C/?ref=eda, SnapEDA_Link=https://www.snapeda.com/parts/BAT160C/NXP+Semiconductors/view-part/?ref=snap, Source=BAT160C.SchLib
DS1 DS2 DS3: library part CMP-2000-07593-1, "LED Red, 75 mW, 54 mcd, -55 to 85 degC, 2-Pin SMD, RoHS, Tape and Reel", Case Code (Imperial)=0805, Case Code (Metric)=2012, Colour=Red, Forward Current=30mA, Forward Voltage=2V, Lens Colour=Colorless, Manufacturer=Lite-On, Max Operating Temperature=85degC, Min Operating Temperature=-55degC, Package Description="2-Pin Surface Mount Device, Body 2 x 1.25 mm", Package Quantity=1, Package Reference=C170KRKT, Power Dissipation=75mW, Test Current=20mA, Case\/Package=0805, Datasheet URL=http://optoelectronics.liteon.com/upload/download/DS-22-99-0150/LTST-C170KRKT.pdf, Datasheet Version="Rev. D, 11/2014", Depth=1.6mm, Dominant Wavelength=631nm, Height=1.1mm, Illumination Colour=Red, Lead Free=LeadFree, Length=3.2mm, Lens Style=Rectangular, Lens Transparency=Clear, Luminous Intensity=54mcd, Manufacturer URL=http://www.us.liteon.com/, Mount=SurfaceMount, Mounting Technology=SurfaceMount, Number of Elements=1, Number of LEDs=1, Number of Pins=2, Packaging=TapeandReel, Power Rating=75mW, Radiation Hardening=No, RoHSCompliant=True, Viewing Angle=130degrees, Wavelength=639nm, Width=1.25mm
IC1: "Integrated Circuit", Manufacturer_Name="Texas Instruments", Mouser Part Number=595-TCAN332DR, Arrow Part Number=TCAN332DR, Arrow Price/Stock=https://www.arrow.com/en/products/tcan332dr/texas-instruments?utm_currency=USD&region=nac, Datasheet Link=http://www.ti.com/lit/ds/symlink/tcan332.pdf, Height=1.75mm, Manufacturer_Part_Number=TCAN332DR, Mouser Price/Stock=https://www.mouser.co.uk/ProductDetail/Texas-Instruments/TCAN332DR?qs=n%252BTO0c4TDSYIUeM9WmVMtA%3D%3D
IC2: "Integrated Circuit", Manufacturer_Name=STMicroelectronics, Mouser Part Number=511-USBLC6-2SC6, Arrow Part Number=USBLC6-2SC6, Arrow Price/Stock=https://www.arrow.com/en/products/usblc6-2sc6/stmicroelectronics?utm_currency=USD&region=europe, Datasheet Link=https://www.st.com/resource/en/datasheet/usblc6-2.pdf, Height=1.45mm, Manufacturer_Part_Number=USBLC6-2SC6, Mouser Price/Stock=https://www.mouser.co.uk/ProductDetail/STMicroelectronics/USBLC6-2SC6?qs=po45yt2pPpu%2FhNIlwQdTlg%3D%3D
IC3: "Integrated Circuit", Manufacturer_Name=Winbond, Mouser Part Number=454-W25Q128JVSIQ, Arrow Part Number=W25Q128JVSIQ, Arrow Price/Stock=https://www.arrow.com/en/products/w25q128jvsiq/winbond-electronics?utm_currency=USD&region=nac, Datasheet Link=https://www.winbond.com/hq/search-resource-file.jsp?partNo=W25Q128JVSIQ&type=datasheet, Height=2.16mm, Manufacturer_Part_Number=W25Q128JVSIQ, Mouser Price/Stock=https://www.mouser.co.uk/ProductDetail/Winbond/W25Q128JVSIQ?qs=qSfuJ%252Bfl%2Fd6tLXvPR4fl9w%3D%3D
IC4: "Integrated Circuit", Manufacturer_Name="Texas Instruments", Mouser Part Number=595-TLV76733DRVR, Arrow Part Number=TLV76733DRVR, Arrow Price/Stock=https://www.arrow.com/en/products/tlv76733drvr/texas-instruments?utm_currency=USD&region=europe, Datasheet Link=http://www.ti.com/lit/gpn/TLV767, Height=0.8mm, Manufacturer_Part_Number=TLV76733DRVR, Mouser Price/Stock=https://www.mouser.co.uk/ProductDetail/Texas-Instruments/TLV76733DRVR?qs=9r4v7xj2LnmGIkwTuPlHig%3D%3D
J1: library part CMP-025-000000-1, "DC-5V 5A Type C USB", Package=Package, Check_prices=https://www.snapeda.com/parts/TYPE-C%2016PIN%202MD%20(073)/Shouhan/view-part/?ref=eda, Component Type=Standard, Design Item ID=TYPE-C_16PIN_2MD_(073), MF=Shouhan, MP="TYPE-C 16PIN 2MD (073)", Pin Count=16, SnapEDA_Link=https://www.snapeda.com/parts/TYPE-C%2016PIN%202MD%20(073)/Shouhan/view-part/?ref=snap, Source=TYPE-C_16PIN_2MD_(073).SchLib
J2 J3 J5 J6 J8 J9 J10 J11 J12 J13 J14 J15 J16 J17 J18 J19: library part CMP-002-00076-3, "3mm x 2mm Pad to solder"
J4: library part CMP-17439-000131-1, "CONN HEADER SMD 4POS 2MM", Orientation=Vertical
J7: "Connector", Manufacturer_Name="Tag Connect", Height=18.669mm, Manufacturer_Part_Number=TC2030-IDC-NL
J20: "Connector", Manufacturer_Name="Korean Hroparts Elec", Datasheet Link=https://datasheet.lcsc.com/szlcsc/1903221101_Korean-Hroparts-Elec-TF-01A_C91145.pdf, Height=1.85mm, Manufacturer_Part_Number=TF-01A
J21: library part CMP-00257-00250026-1, "70247-1652 Conn Shrouded Header HDR 16 POS 2.54mm Solder RA Thru-Hole C-Grid® Tray", Color=Black, Current Rating=2.5A, Flammability Rating="UL94 V-0", Manufacturer Lifecycle Status=ACTIVE, Max Operating Temperature=120°C, Min Operating Temperature=-55°C, Voltage Rating=250V, Connector Type="Male Pin", Contact Material="Bronze, Gold, Nickel", Contact Mating Length=6.096mm, Contact Plating=Gold, Country of Origin=SK, ELV=Compliant, Gender=Male, Glow Wire Compliant=Non-compliant, Height=8.89mm, Housing Color=Black, Housing Material=Polyester, Lead Free="Lead Free", Length=27.9mm, Lifecycle Status=Production, Material=Polyester, Mount="Through Hole", NexarPartId=250026, Number of Circuits=16, Number of Contacts=16, Number of Positions=16, Number of Rows=2, Orientation="Right Angle", Pitch=2.54mm, Plating=Tin, Radiation Hardening=No, REACH SVHC="No SVHC", RoHS=Compliant, Row Spacing=2.54mm, Termination=Solder, Width=9.27mm
R1 R4 R8 R9 R10 R11 R25 R29 R30 R31 R35 R36 R37 R38 R39 R40 R41 R42 R43 R44 R45 R47 R48 R49: library part CMP-009-00168-3, "Chip Resistor, 22Ohms, +/-1 %, 63 mW, -55 to 155 degC, 0402", Case/Package=0402, Max Operating Temperature=155°C, Min Operating Temperature=-55°C, Power=63mW, Tolerance=1%, Pins=2
R2 R5: library part CMP-009-00168-3, "Chip Resistor, 5.1 kOhms, +/-1 %, 63 mW, -55 to 155 degC, 0402", Case/Package=0402, Max Operating Temperature=155°C, Min Operating Temperature=-55°C, Power=63mW, Tolerance=1%, Pins=2
R3 R7 R21 R27 R28 R34 R46: library part CMP-009-00149-3, "Chip Resistor, 10 kOhms, +/-1 %, 63 mW, -55 to 125 degC, 0402", Case/Package=0402, Max Operating Temperature=155°C, Min Operating Temperature=-55°C, Power=63mW, Tolerance=1%, Pins=2
R6: library part CMP-009-00168-3, "Chip Resistor, 120 Ohms, +/-1 %, 63 mW, -55 to 155 degC, 0402", Case/Package=0402, Max Operating Temperature=155°C, Min Operating Temperature=-55°C, Power=63mW, Tolerance=1%, Pins=2
R12 R13 R14 R15 R24 R26: library part CMP-009-00168-3, "Chip Resistor, 100 kOhms, +/-1 %, 63 mW, -55 to 155 degC, 0402", Case/Package=0402, Max Operating Temperature=155°C, Min Operating Temperature=-55°C, Power=63mW, Tolerance=1%, Pins=2
R16 R17 R22 R23 R32 R33: library part CMP-009-00105-2, "4K7 0.063W 1% 0402 (1005 Metric)  SMD", Case/Package=0402, Power=63mW, Tolerance=1%, Mounting Technology=SMT, Pins=2
R18 R19 R20: library part CMP-009-00122-3, "Chip Resistor, 470 Ohms, +/-5%, 125 mW, -55 to 155 degC, 0805", Case/Package=0805, Max Operating Temperature=155°C, Min Operating Temperature=-55°C, Power=125mW, Tolerance=5%, Pins=2
S1: "Switch", Manufacturer_Name=XUNPU, Datasheet Link=https://www.xunpudianzi.com/uploads/pdf/TS-1088-ARXXX.pdf, Height=2mm, Manufacturer_Part_Number=TS-1088-AR02016
U1: library part CMP-031-00006-1, "ARM Microcontrollers - MCU High-performance and DSP with DP-FPU, ARM Cortex-M7 MCU with 2MBytes Flash, 1MB RAM, 400 MHz CPU, Art Accelerator, L1 cache, external memory interface, large set of peripherals", Manufacturer_Name=STMicroelectronics, Datasheet Link=https://www.st.com/resource/en/datasheet/stm32h743vi.pdf, Design Item ID=STM32H743VIT6, Geometry.Height=1.6mm, Manufacturer_Part_Number=STM32H743VIT6, Source=STM32H743VIT6.SchLib
U2 U3: library part CMP-031-00007-1, "P-Sensor SPI I2C 1, 25 Bar SMD", Case/Package=None, Availability=Unavailable, Component Type=Standard, Design Item ID=BMP388, MP=BMP388, Pins=10, Price=None, Source=BMP388.SchLib
U4: library part CMP-021-000000-1, "Accelerometer, Gyroscope, 6 Axis Sensor Output", Package=None, Availability=Unavailable, Component Type=Standard, Design Item ID=ICM-42688-P, MP=ICM-42688-P, Pin Count=14, Price=None, Source=ICM-42688-P.SchLib
U5: library part CMP-031-00008-1, "Accelerometer, Gyroscope, 6 Axis Sensor IÂ²C, SPI Output", Case/Package="LGA-14 Bosch Sensortec", Check_prices=https://www.snapeda.com/parts/BMI270/Bosch+Sensortec/view-part/?ref=eda, Component Type=Standard, Design Item ID=BMI270, Digi-Key_Part_Number=828-1091-2-ND, MF="Bosch Sensortec", MP=BMI270, Pins=14, Purchase-URL=https://pricing.snapeda.com/search/part/BMI270/?ref=eda, SnapEDA_Link=https://www.snapeda.com/parts/BMI270/Bosch+Sensortec/view-part/?ref=snap, Source=BMI270.SchLib
Y1: "Crystal or Oscillator", Manufacturer_Name="Yangxing Tech", Datasheet Link=https://datasheet.lcsc.com/szlcsc/Yangxing-Tech-X322516MLB4SI_C13738.pdf, Height=0.8mm, Manufacturer_Part_Number=X322516MLB4SI

## Free pads (board coordinates)
  round 6 hole 3: 6(3.5,3.5) 6(21.844,50.419) 6(42.418,3.556) 6(42.474,50.475)

## Via types
v1: diameter 0.6, hole 0.3, Top Layer to Bottom Layer, 121 vias
v2: diameter 0.7, hole 0.4, Top Layer to Bottom Layer, 18 vias